# Altium PCB LiPOBattery.PcbDoc
Units mil, origin at the board's own origin, x right, y up, seen from the top; angles counter-clockwise.
Board outline 2112.53 x 2610.03 mil, 2 copper layers (Top Layer, Bottom Layer); 22 components, 10 nets, 56 pads, 8 vias.
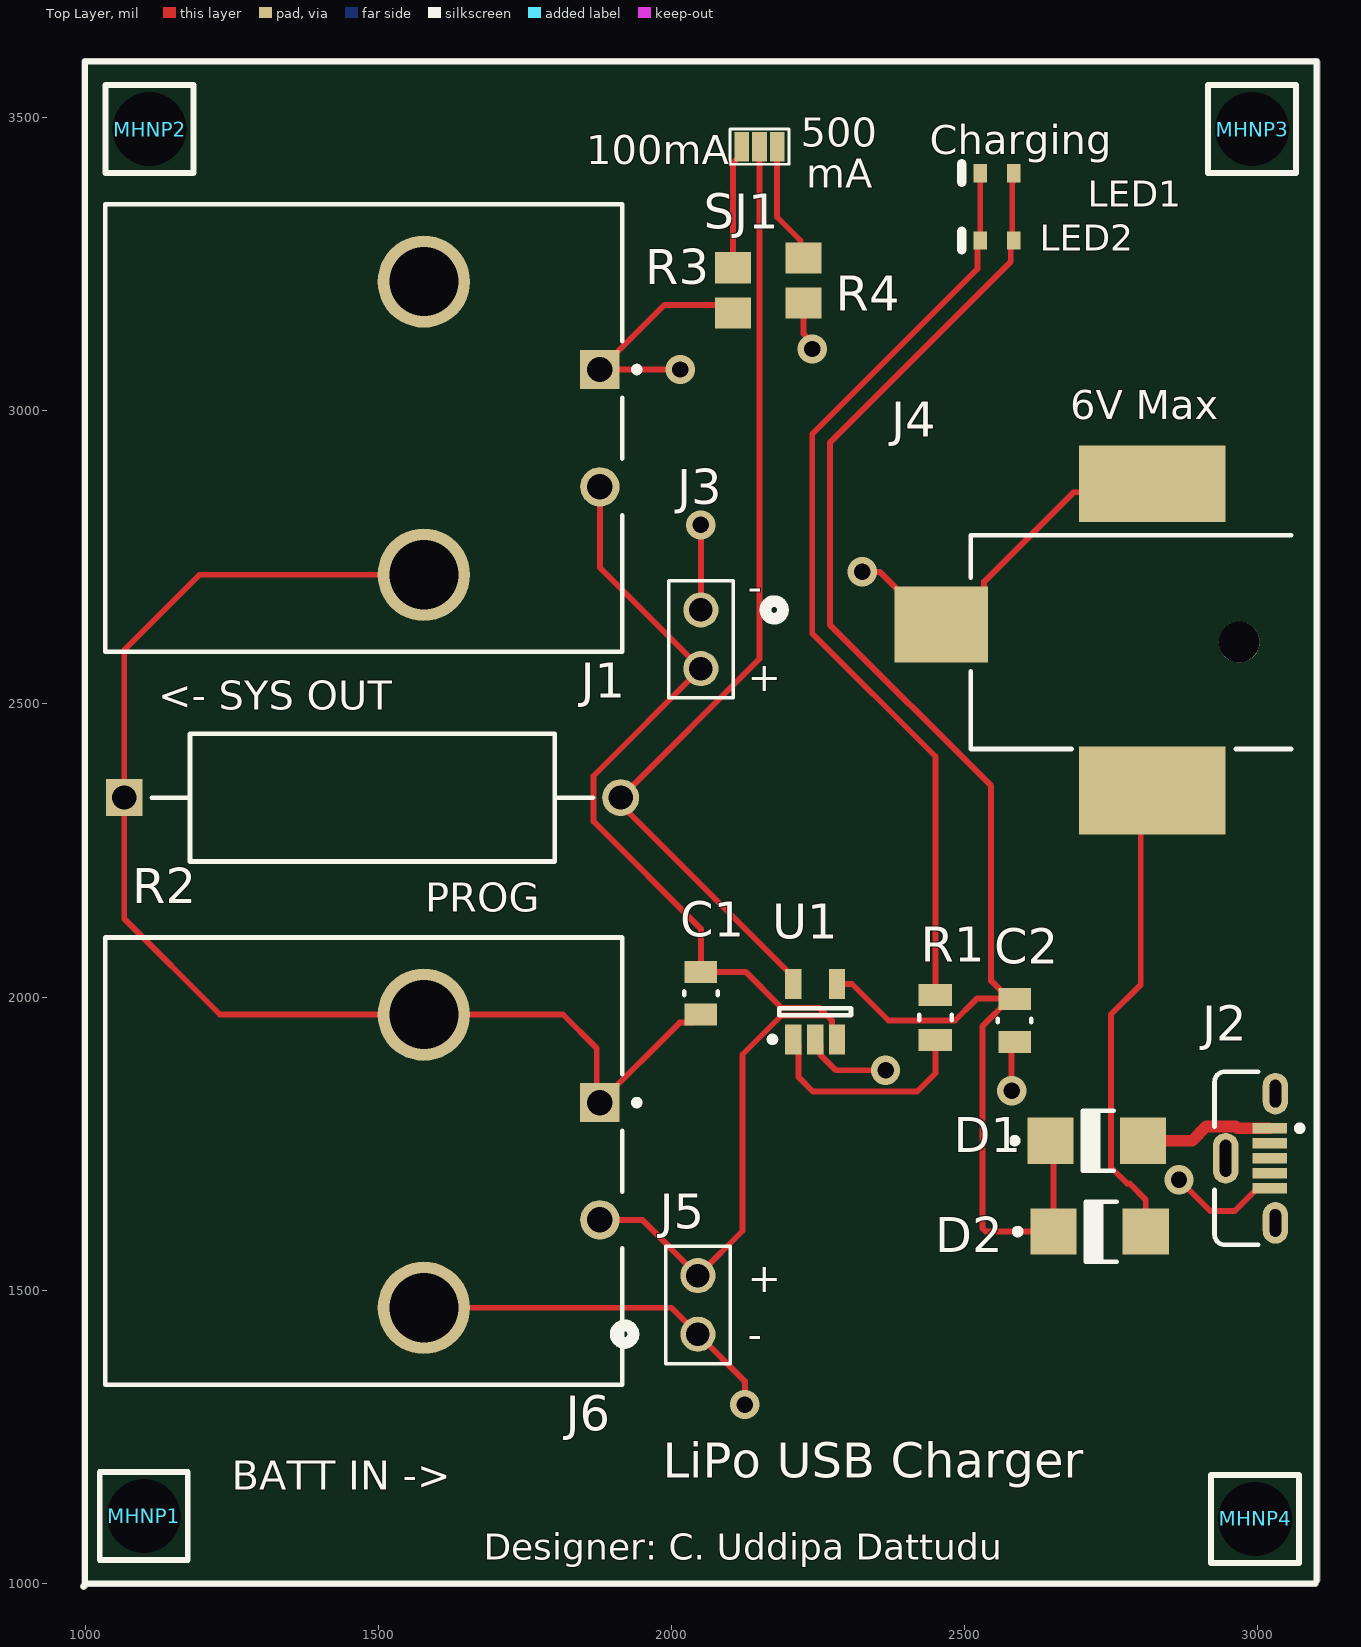
[diagram p0: Top Layer view]
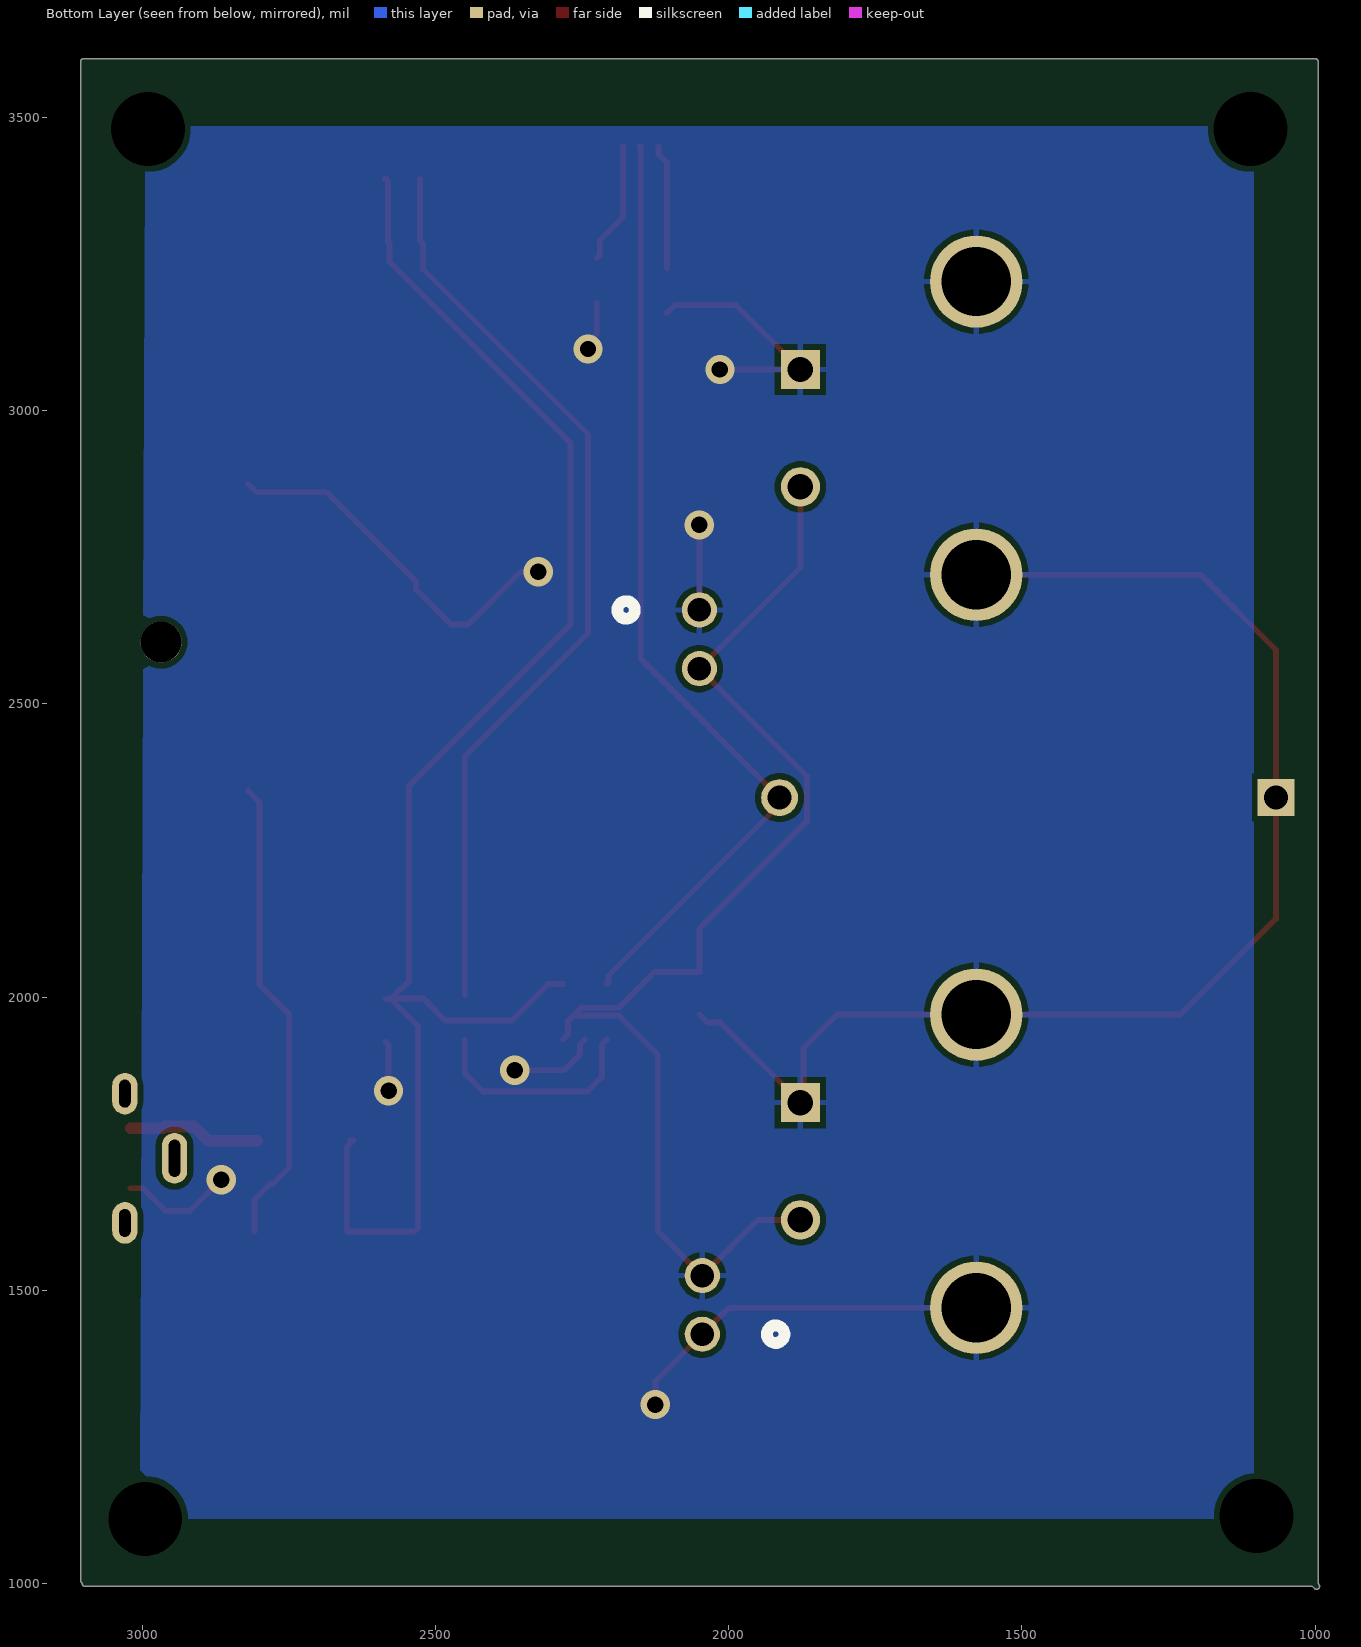
[diagram p1: Bottom Layer view, seen from below]

## Layer stack, top to bottom
Top Solder: solder mask 0.4, Solder Resist, Dk 3.5
Top Layer: signal copper 1.4
Dielectric 1: dielectric 12.6, FR-4, Dk 4.8
Bottom Layer: signal copper 1.4
Bottom Solder: solder mask 0.4, Solder Resist, Dk 3.5

## Board outline
994.99,1000 994.99,3595 cw(c1000,3595) 1000,3600.01 3100,3600.01 cw(c3100,3595) 3105.01,3595 3105.02,1005 cw(c3100,1005) 3102.47,1000.64 3102.51,1000 cw(c3097.5,1000) 3097.5,994.99 1004.58,994.99 1001.05,991.45 cw(c997.5,995)

## Design rules (kind name [scope] priority, off if disabled: settings)
Clearance [All] p1: gap=6 ignorepadtopadclearanceinfootprint=TRUE
PolygonConnect [All] p1: connectstyle=Relief reliefconductorwidth=10 reliefentries=4 polygonreliefangle="90 Angle" airgapwidth=10
RoutingVias [All] p1: holewidth=28 width=50 viastyle="Through Hole" minholewidth=28 minwidth=50 maxholewidth=28 maxwidth=50
SolderMaskExpansion [All] p1: expansion=0 istentingtop=FALSE
SupplyNets "Schematic Supply Nets" [InNet('GND')] p1: voltage=0.000
Width [All] p1: maxlimit=10 minlimit=10 preferedwidth=10
30 further rules are at their usual default settings.

## Components (designator, comment, footprint, x,y, rotation, side; value= is the part's Value field where it differs from the comment)
C1 "4.7uF" FP-CC0805-0_85-MFG 2050,2006.42 r270 top value="4.7 uF"
C2 "4.7uF" FP-CC0805-0_85-MFG 2585,1960 r270 top value="4.7 uF"
D1 "40V, 1A" ONSC-SMA-2-403D-02_V 2725,1755 r0 top
D2 "40V, 1A" ONSC-SMA-2-403D-02_V 2730,1600 r0 top
J1 "1-179276-2" FP-1-179276-2-MFG 1475,2970 r270 top locked
J2 "Micro-USB B Receptacle" MOLX-105133-0001_V 2987.32,1725 r270 top locked
J3 "2 POS VERT HEADER 0.001" 2Pins_AMP 2050,2660 r180 top
J4 "CONN PWR JACK 2.1X5.5MM SOLDER" FP-RASM722PTR13X-MFG 2800.55,2605.08 r90 top locked
J5 "2 POS VERT HEADER 0.001" 2Pins_AMP 2045,1425 r0 top
J6 "1-179276-2" FP-1-179276-2-MFG 1475,1720 r270 top locked
LED1 "RED" VISH-TLMS1000_V 2555,3405 r180 top
LED2 "RED" VISH-TLMS1000_V 2555,3290 r180 top
MHNP1 "Mounting Hole Non Plated 3.2mm" MTHNP3P2MM 1100,1115 r90 top
MHNP2 "Mounting Hole Non Plated 3.2mm" MTHNP3P2MM 1110,3480 r90 top
MHNP3 "Mounting Hole Non Plated 3.2mm" MTHNP3P2MM 2990,3480 r90 top
MHNP4 "Mounting Hole Non Plated 3.2mm" MTHNP3P2MM 2995,1110 r90 top
R1 "330" FP-CRCW0805-e3-MFG 2450,1965 r270 top
R2 "PROG" FP-RS02B-MFG 1490,2340 r0 top locked
R3 "2k" RESC2013X70X40ML20T20 2105,3205 r90 top
R4 "2k" RESC2013X70X40ML20T20 2225,3221.61 r90 top
SJ1 "SJUMPER" SJUMPER-Footprint-1 2150,3450 r0 top
U1 "Charge Management Controller" SOT-23-OT5_M 2245,1975 r90 top

## Footprints (in the part's own frame and the unit in brackets; to place one, negate y for a bottom-side part, rotate by r counter-clockwise, add the part's x,y. Pads: shape width x height; smd on the part's side, far side on the other; paste and mask are expansions set on the pad)
2Pins_AMP [mil]
  round 60 hole 40 paste-99999 mask+0: 1(0,0) 2(0,100)
  silkscreen extent -140,-50 55,150
FP-1-179276-2-MFG [mm]
  rect 1.7x1.7 hole 1.1 paste-2539.97 mask+0: 1(-2.54,10.23)
  round 1.7 hole 1.1 paste-2539.97 mask+0: 2(2.54,10.23)
  round 4 hole 3 paste-2539.97 mask+0: 3(-6.35,2.61) 4(6.35,2.61)
  silkscreen extent -9.69,-11.2 9.69,11.96, body extent -9.79,-11.3 9.79,11.3, height 0.25
FP-CC0805-0_85-MFG [mm]
  rect 0.95x1.4 smd paste+0 mask+0: 1(-0.925,0) 2(0.925,0)
  silkscreen extent -0.08,-0.72 0.08,0.72, body extent -1.6,-1.05 1.6,1.05, height 0.25
FP-CRCW0805-e3-MFG [mm]
  rect 0.95x1.45 smd paste+0 mask+0: 1(-0.975,0) 2(0.975,0)
  silkscreen extent -0.13,-0.7 0.13,0.7, body extent -1.55,-0.82 1.55,0.82, height 0.25
FP-RASM722PTR13X-MFG [mm]
  rect 3.3x4.06 smd paste+0 mask+0: 1(0.76,8.65)
  rect 3.81x6.35 smd paste+0 mask+0: 2(-6.43,-0.49)
  rect 3.3x6.35 smd paste+0 mask+0: 3(6.86,-0.49)
  round 1.78 hole 1.78 unplated paste-2539.97 mask+0: ""(0,-4.25)
  silkscreen extent -4.63,-6.5 4.63,7.38, body extent -8.43,-7.48 8.61,10.78, height 0.25
FP-RS02B-MFG [mm]
  rect 1.6x1.6 hole 1.05 paste-2539.97 mask+0: 1(-10.751,0)
  round 1.6 hole 1.05 paste-2539.97 mask+0: 2(10.751,0)
  silkscreen extent -9.55,-2.77 9.55,2.77, body extent -11.65,-2.87 11.65,2.87, height 0.25
MOLX-105133-0001_V [mm] "Micro USB B, 5-Leads, Pitch 0.65mm"
  rect 0.45x1.5 smd: 1(-1.3,0.825) 2(-0.65,0.825) 3(0,0.825) 4(0.65,0.825) 5(1.3,0.825)
  oval 1.8x1.1 hole 0.5 slot 1.2 at 0 deg: 6(-2.8,1.075) 7(2.8,1.075)
  oval 2.2x1.1 hole 0.5 slot 1.6 at 0 deg: 8(0,-1.075)
  silkscreen extent -3.75,-1.56 3.75,2.25, body extent -4.02,-2.22 4,2.23, height 7.51
MTHNP3P2MM [mm] "Mounting Hole, Non-Plated, 3.2mm hole"
  round 1 hole 3.2: 1(0,0)
  silkscreen extent -1.91,-1.91 1.91,1.91
ONSC-SMA-2-403D-02_V [mm] "Molded, 2-Leads, Body 4.57x2.92mm"
  rect 2x2 smd: 1(-2,0) 2(2,0)
  silkscreen extent -3.67,-1.3 0.74,1.3, body extent -2.16,-1.3 2.16,1.3, height 2.2
RESC2013X70X40ML20T20 [mm] "Chip Resistor, 2-Leads, Body 2.00x1.25mm, IPC Low Density"
  rect 1.35x1.55 smd: 1(-0.975,0) 2(0.975,0)
  body extent -1.1,-0.72 1.1,0.72, height 0.7
SJUMPER-Footprint-1 [mil]
  rect 25x50 smd: 1(-30,0) 2(0,0) 3(30,0)
  silkscreen extent -50,-30 50,30
SOT-23-OT5_M [mm] "SOT23, 5-Leads, Body 2.9x1.7mm, Pitch 0.95mm, Lead Span 2.8mm, IPC Low Density"
  rect 1.3x0.7 smd: 1(-1.2,0.95) 2(-1.2,0) 3(-1.2,-0.95) 4(1.2,-0.95) 5(1.2,0.95)
  silkscreen extent -1.32,-1.55 0.15,1.97, body extent -0.9,-1.55 0.9,1.55, height 1.45
VISH-TLMS1000_V [mm] "SMD, 2-Leads, Body 0.8x1.6mm"
  rect 0.6x0.8 smd: 1(-0.725,0) 2(0.725,0)
  silkscreen extent 1.52,-0.4 1.52,0.4, body extent -0.8,-0.4 0.8,0.4, height 0.65

## Part data
C1 C2: library part CMP-03422-001342-1, "CAP CER 4.7UF 6.3V X7R 0805", Capacitance="4.7 uF", Manufacturer=Yageo, Manufacturer Part Number=CC0805KKX7R5BB475, Package=CC0805-0.85, Temperature="-30°C to +85°C", Temperature Characteristic=X7R, Temperature Range High=+85°C, Temperature Range Low=-30°C, Tolerance=0.1, Voltage Rating="6.3 V", Automotive=No, Category=Cap, ComponentLink2Description=Datasheet, ComponentLink2URL=http://www.yageo.com/documents/recent/UPY-GPHC_Y5V_6.3V-to-50V_8.pdf, Device Class L1="Passive Components", Device Class L2=Capacitors, Device Class L3="Ceramic Capacitors", Digikey Description="CAP CER 4.7UF 6.3V X7R 0805", Footprint Url=http://www.yageo.com/exep/pages/download/literatures/UPY-C_GEN_24.pdf, Height=0.95mm, Ipc Land Pattern Name=CAPC200125X85, Lead Free=Yes, Material=Ceramic, Mouser Description="Multilayer Ceramic Capacitors MLCC - SMD/SMT 4.7uF 6.3V X7R 10%", Octopart=https://octopart.com/cc0805kkx7r5bb475-yageo-27548069, RoHS=TRUE
D1 D2: library part CMP-1055-00320-1, "Schottky Power Rectifier, 2-Pin SMA, Pb-Free, Tape and Reel", Manufacturer="On Semiconductor", PartNumber=MBRA140T3G, ComponentLink1Description="Manufacturer URL", ComponentLink1URL=http://www.onsemi.com/, ComponentLink2Description=Datasheet, ComponentLink2URL=http://www.onsemi.cn/pub_link/Collateral/MBRA140T3-D.PDF, ComponentLink3Description="Package Specification", ComponentLink3URL=http://www.onsemi.com/pub_link/Collateral/403D-02.PDF, Configuration=Single, DatasheetVersion="Rev. 10", IFSM Max (A)=30, Mounting Technology="Surface Mount", PackageDescription="2-Pin Small Molded Package, J-Bend Lead, Body 2.605 x 4.315 mm", PackageReference=SMA-2-403D-02, PackageVersion="Rev. G, 07/2012", Packing="Tape and Reel", RoHS=TRUE
J1 J6: library part CMP-03369-000124-1, "CONN HEADER R/A 2POS 5.08MM", Color=Black, Contact Current Rating=15A, Flammability Rating="UL94 V-0", Max Operating Temperature=221°C, Max Voltage Rating (AC)=600V, Min Operating Temperature=-67°C, Package Quantity=26, Approvals=UL, Connector System=Wire-to-Board, Connector Type=Plug, Contact Gender=Male, Contact Material="Copper Alloy", Contact Plating=Gold, Contact Retention="No (Without)", Contact Type="Male Pin", Depth=22.1mm, ELV=Compliant, Halogen Free="Halogen Free", Height=0.368inch, Housing Color=Black, Housing Material=Polyester, Lead Free="Lead Free", Length=0.751inch, Mating Alignment="Yes (With)", Mating Retention="Yes (With)", Mount="Through Hole", Number of Contacts=2, Number of Ports=1, Number of Positions=2, Number of Rows=1, Number of Terminals/Pins=2, Orientation="Right Angle", Packaging=Tray, PCB Mount Alignment="No (Without)", PCB Mount Retention=With, PCB Mounting Orientation="Right Angle", PCB Thickness=0.063inch, Pitch=0.2inch, Preloaded=Yes, Radiation Hardening=No, REACH SVHC="No SVHC", RoHS Compliant=Yes, Sealable="No (Without)", Selectively Loaded="No (Without)", Series="Dynamic 3200", Shielding=Unshielded, Shrouded="Yes (With)", Strain Relief="No (Without)", Tail Length=3.8mm, Termination=Solder, VDE Tested=No, Voltage Rating=600V, Width=22.1mm
J2: library part CMP-2000-05829-1, "Micro-USB B Receptacle, Vertical, -30 to 85 degC, 5-Pin SMD, RoHS, Tape and Reel", Color=Black, Current Rating=1.8A, Flammability Rating=UL94V-0, Manufacturer=Molex, Package Description="5-Pin Surface Mount Device, Pitch 0.65 mm", Package Reference=105133-0001, Package Version="Rev. C, 11/2015", Voltage - Max=30V, Voltage Rating=30VAC, Brand=Molex, Connector Type=MicroUSBTypeBReceptacle, Contact Material=CopperAlloy, Contact Plating=Gold, Datasheet URL=http://www.molex.com/webdocs/datasheets/pdf/en-us/1051330001_IO_CONNECTORS.pdf, Datasheet Version=03/2016, Factory Pack Quantity=6000, Gender=Receptacle, Manufacturer URL=http://www.molex.com/, Mounting Angle=Vertical, Mounting Style=SMD/SMT, Mounting Technology=SurfaceMount, Number of Ports=1, Package URL=http://www.molex.com/pdm_docs/sd/1051330001_sd.pdf, Packaging=Reel, PartNumber=105133-0001, Product=MicroUSBTypeBConnectors, Product Category=USBConnectors, RoHS=Details, Series=105133, Standard=USB, Termination Style=SolderTail
J3 J5: library part 67997-402HLF, "Description", Manufacturer_Name="Amphenol ICC", Supplier Part Number 1=609-5502-ND, Copyright="Copyright (C) 2025 Ultra Librarian. All rights reserved.", Manufacturer_Part_Number=67997-402HLF, RefDes=RefDes, Supplier 1=DigiKey, Type=Type
J4: library part CMP-47995-000002-1, Case/Package=SMD/SMT, Color=Black, Current Rating=5A, Package Quantity=120, Connector Type=Jack, Contact Material="Copper Alloy", Contact Plating=Tin, Gender=Male, Housing Color=Black, Housing Material=Thermoplastic, Mount="Surface Mount", Shielding=Unshielded, Termination=Solder
LED1 LED2: library part CMP-2000-07254-1, "Low Current LED, 40 mW, 1.8 V, -40 to 100 degC, 2-Pin SMD (0603), RoHS, Tape and Reel", Forward Current If=2mA, Forward Voltage=1.8V, LED Colour=Red, Manufacturer=Vishay, Package Description="2-Pin Surface Mount Device, Body 1.6 x 0.8 mm", Package Reference=TLMS1000, Automotive Qualification Standard=AEC-Q100, Bulb Size=1.6mmx0.8mm, Datasheet URL=https://datasheet.ciiva.com/5798/1698881-5798337.pdf, Datasheet Version="Rev. 1.7, 02/2011", LED Mounting=SMD, Lens Shape=Rectangular, Luminous Intensity=4mcd, Manufacturer URL=http://www.vishay.com/, Mounting Technology=SurfaceMount, MSL=MSL2-1year, Packaging=CutTape, Product Range=-, SVHC=ToBeAdvised, Viewing Angle=80°, Wavelength Typ=636nm
MHNP1 MHNP2 MHNP3 MHNP4: library part MTHNP3P2MM, "Mounting Hole Non Plated 3.2mm drill hole"
R1: library part CMP-2001-03823-2, "RES Thick Film, 330Ω, 1%, 0.125W, 100ppm/°C, 0805", Case Code (Imperial)=0805, Case Code (Metric)=2012, Max Operating Temperature=155°C, Max Power Dissipation=125mW, Min Operating Temperature=-55°C, Package Quantity=10, Resistance=330R, Temperature Coefficient=100ppm/°C, Tolerance=1%, Voltage Rating=150V, Case/Package=0805, Composition="Thick Film", Contact Plating=Tin, Depth=1.25mm, Features="Automotive AEC-Q200", Height=0.02inch, Lead Free="Lead Free", Length=2mm, Military Standard=Not, Mount="Surface Mount", Number of Terminations=2, Packaging="Tape and Reel", Power Rating=125mW, Termination=SMD/SMT, Voltage Rating (DC)=150V, Weight=0.000194oz, Width=0.049inch
R2: library part CMP-02408-000037-1, "Res Wirewound 12K Ohm 1% 3W ±20ppm/°C Ceramic Hi Temp Sil AXL Thru-Hole Bulk", Case/Package=Ceramic, Max Operating Temperature=250°C, Min Operating Temperature=-65°C, Package Quantity=100, Power Rating=3W, Resistance=12kR, Resistor Type=Wirewound, Temperature Coefficient=20ppm/°C, Tolerance=1%, Contact Plating=Tin, Diameter=4.75mm, Lead Diameter=0.81mm, Lead Free="Lead Free", Length=14.22mm, Mount="Through Hole", RoHS Compliant=Yes, Series=RS, Termination=Axial, Weight=0.024692oz, Width=4.75mm
R3 R4: library part CMP-2001-00370-1, Manufacturer=Panasonic, Part Number=ERJ-6GEYJ202V
SJ1: library part CMP-00030-00002-1, "Solder jumper pad"
U1: library part CMP-0133-00139-1, "Simple, Miniature Single-Cell, Fully Integrated Li-Ion/Li-Polymer Charge Management Controller, 4.2V, 5-Pin SOT-23, Industrial Temperature, Tape and Reel", Code_IPC=SOT23-5, DatasheetVersion="revB, Sep-2007", PackageDescription="5-Lead Plastic Small Outline Transistor (OT) [SOT-23]", PackageReference=SOT-23-OT5, PackageVersion="revBB, Aug-2009"

## Via types
v1: diameter 50, hole 28, Top Layer to Bottom Layer, 8 vias

## Nets (pads, with @x,y where several pads share a name; then routed paths per layer and width w, separated by ;. In a path a pad name is that pad's centre, name@x,y a point inside that pad or via, vN(x,y) a via of type N, cw(c..) or ccw(c..) an arc to the next point about the centre after c; other vN are vias at no path point)
GND: C1.2 C2.2 J1.1 J1.3 J1.4 J2.5 J3.1 J4.1 J4.3 J5.1 J6.1 J6.3 J6.4 R2.1 R3.1 R4.1 U1.2 | length 4616.5
  Top Layer w10: J6.4 2000,1470 J5.1 2045.41,1424.59 2125,1345 v1(2125,1305) ; J1.4 1195,2720 1066.72,2591.72 R2.1 1066.72,2133.28 1230,1970 J6.3 1815,1970 1872.39,1912.61 1872.39,1825.36 J6.1 2014.06,1956.3 2036.3,1956.3 C1.2 ; v1(2015,3070) J1.1 1987.76,3180 2091.61,3180 R3.1 ; J3.1 v1(2050,2805) ; R4.1 2225,3130.82 2240,3115.82 v1(2240,3105) ; U1.2 2253.78,1918.98 2253.78,1901.45 2280.23,1875 v1(2365,1875) ; v1(2325,2725) 2355.04,2725 2445.04,2635 2473.09,2635 2533.05,2694.96 2533.05,2708.05 2685.7,2860.7 2805.39,2860.7 J4.3 ; v1(2580,1840) 2580,1918.58 C2.2 ; v1@2876.11,1688.55 v1(2865.28,1688.55) 2918.83,1635 2960.32,1635 2999.13,1673.82 J2.5
  Bottom Layer w10: R2.1@1065,2340 R2.1 ; J5.1 J5.1@2045.82,1424.18
NetC1_1: C1.1 J1.2 J3.2 J5.2 J6.2 U1.3 | length 2140.3
  Top Layer w10: J6.2 1950,1620 J5.2@2040,1530 ; J1.2 1877.76,2732.24 J3.2 1866.78,2376.78 1866.78,2299.51 2050,2116.29 C1.1 2126.42,2042.83 2187.61,1981.65 2251.69,1981.65 2264.99,1968.35 ; U1.3 2273.78,1936.38 2273.78,1959.56 2264.99,1968.35 ; J5.2@2040,1530 J5.2 J5.2@2040,1530 ; J5.2@2040,1530 2045,1530 2050,1530 2121.09,1601.09 2121.09,1901.83 2187.61,1968.35 2264.99,1968.35
NetC2_1: C2.1 D1.1 D2.1 LED1.1 LED2.1 U1.4 | length 2701.7
  Top Layer w10: U1.4 2307.76,2022.24 2370,1960 2483.36,1960 2515.95,1992.59 2520.68,1997.33 C2.1@2575.23,1997.33 ; C2.1@2576.14,1996.42 2530,1950.28 2530,1605.86 2535.86,1600 D2.1 2651.26,1743.7 2643.11,1751.85 2639.96,1755 D1.1 ; LED1.1@2583.54,3395 2586.5,3395 2581.04,3389.55 2581.04,3287.5 2578.54,3285 2578.54,3253.54 2270,2945 2270,2635 2545,2360 2545,2027.56 C2.1@2575.23,1997.33 ; C2.1 2577.05,1996.42 2576.14,1997.33 C2.1@2575.23,1997.33
NetD1_2: D1.2 J2.1 | length 227.4
  Top Layer w10: 2961.81,1779.31 2964.94,1776.18
  Top Layer w20: D1.2 2887.81,1755 2912.11,1779.31 2961.81,1779.31 ; 2964.94,1776.18 J2.1
NetD2_2: D2.2 J4.2 | length 808.2
  Top Layer w10: D2.2 2808.74,1654.37 2781.22,1681.89 2776.89,1681.89 2749.37,1709.42 2749.37,1970.36 2800,2020.99 2800,2332.09 J4.2
NetLED1_2: LED1.2 LED2.2 R1.1 | length 1597.3
  Top Layer w10: R1.1 2450,2410 2240,2620 2240,2960 2521.46,3241.46 2521.46,3285 LED2.2 LED1.2@2526.46,3395
NetR1_2: R1.2 U1.1 | length 381
  Top Layer w10: U1.1 2216.22,1919.13 2216.22,1863.78 2241,1839 2419,1839 2450,1870 R1.2
NetR2_2: R2.2 SJ1.2 U1.5 | length 1651.3
  Top Layer w10: SJ1.2 2152.5,3450 2150,3447.5 2150,2576.72 R2.2 1913.28,2328.38 2205,2036.65 2205,2025 2207.6,2022.4 U1.5
NetR3_2: R3.2 SJ1.1 | length 212.8
  Top Layer w10: R3.2 2105,3422.5 2120,3437.5 SJ1.1
NetR4_2: R4.2 SJ1.3 | length 208.6
  Top Layer w10: SJ1.3 2180,3330 2220,3290 2220,3265 R4.2
pads on no net: J2.2 J2.3 J2.4 J2.6 J2.7 J2.8 J4. MHNP1.1 MHNP2.1 MHNP3.1 MHNP4.1

## Polygon pours and split planes (outlines as drawn)
GND on Bottom Layer "GND_L02_P000" (solid, pour order 0): 1104.99,3484.99 2995.01,3484.99 3003.45,1110.01 1104.99,1110.01

## Silkscreen, mask and mechanical layers (free items; w line width, h text height)
Top Overlay:
  lines w10: 997.5,995 1002.5,1000 3097.5,1000 ; 1000,1000 1000,3595 3100,3595 3100,1005
  text "500" at 2220,3450 h50
  text "Charging" at 2440,3436.66 h50
  text "100mA" at 1855,3420 h50
  text "mA" at 2230,3380 h50
  text "6V Max" at 2680,2985 h50
  text "-" at 2130,2675.01 h50
  text "+" at 2130,2521.67 h50
  text "<- SYS OUT" at 1125,2490 h50
  text "PROG" at 1580,2145 h50
  text "+" at 2130,1496.67 h50
  text "-" at 2130,1400.01 h50
  text "LiPo USB Charger" at 1985,1179.99 h60
  text "BATT IN ->" at 1250,1160 h50
  text "Designer: C. Uddipa Dattudu" at 1680,1040 h45